# Altium PCB QEV1_Shutdown1_final.PcbDoc
Units mm, origin at the board's own origin, x right, y up, seen from the top; angles counter-clockwise.
Board outline 167.1 x 73.86 mm, 2 copper layers (Top Layer, Bottom Layer), stack 1.591 mm thick; 128 components, 110 nets, 435 pads, 215 vias.
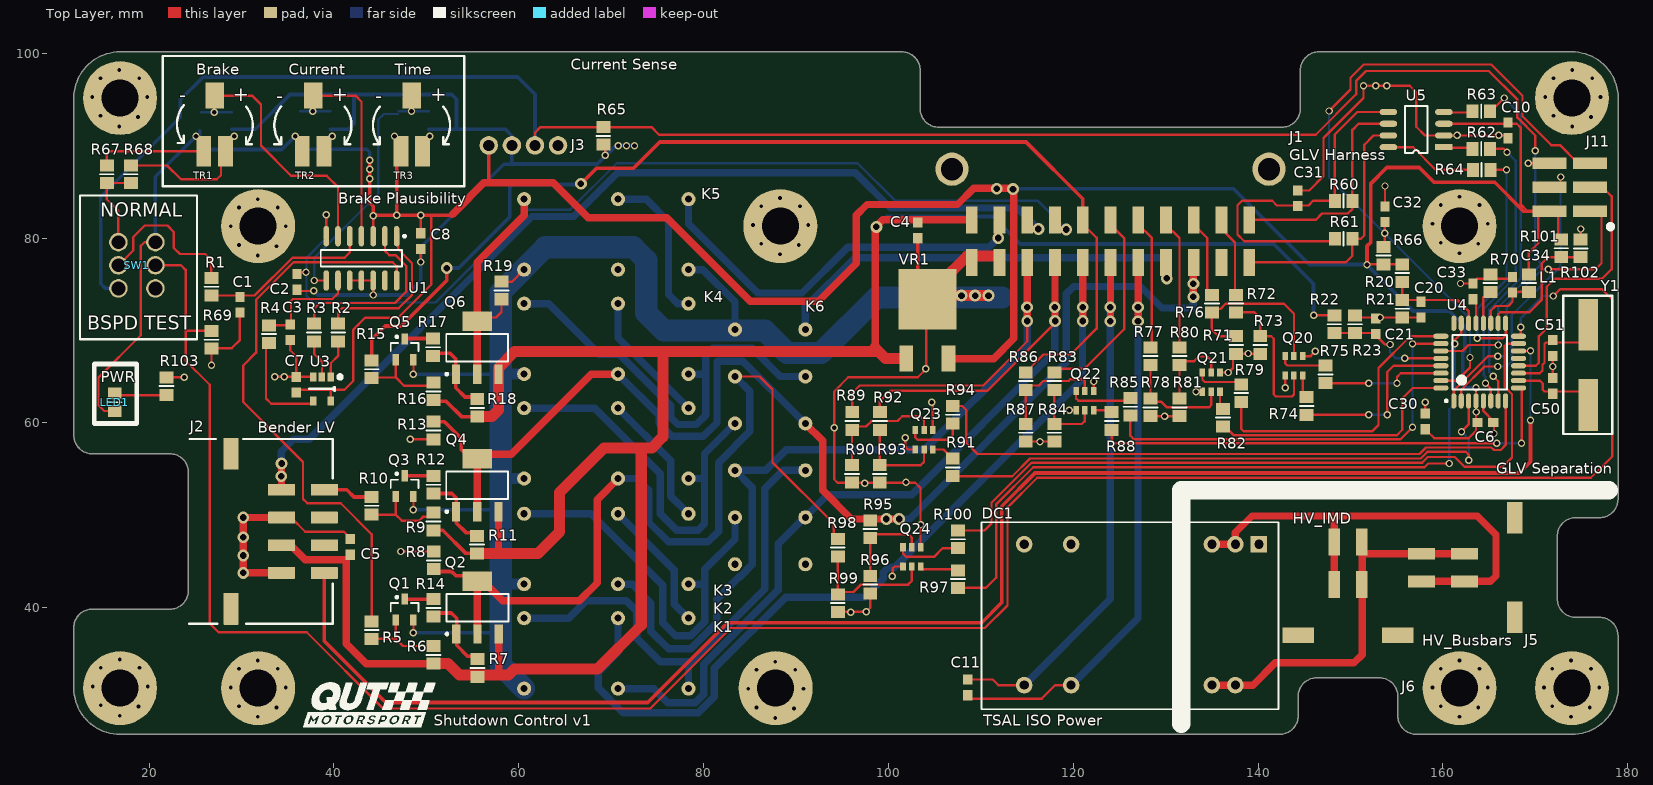
[diagram p0: Top Layer view]
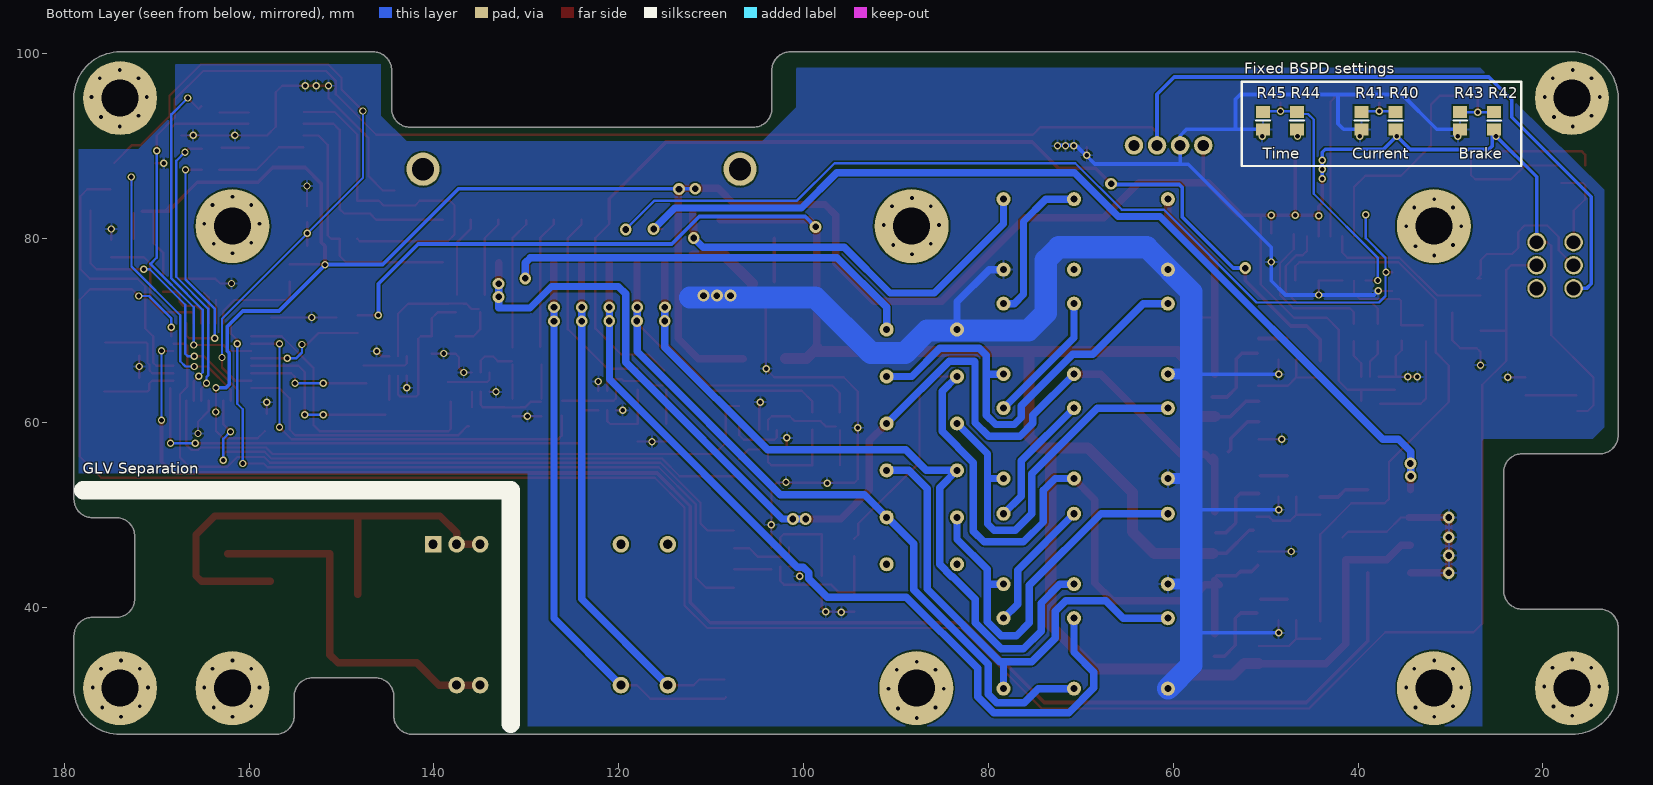
[diagram p1: Bottom Layer view, seen from below]
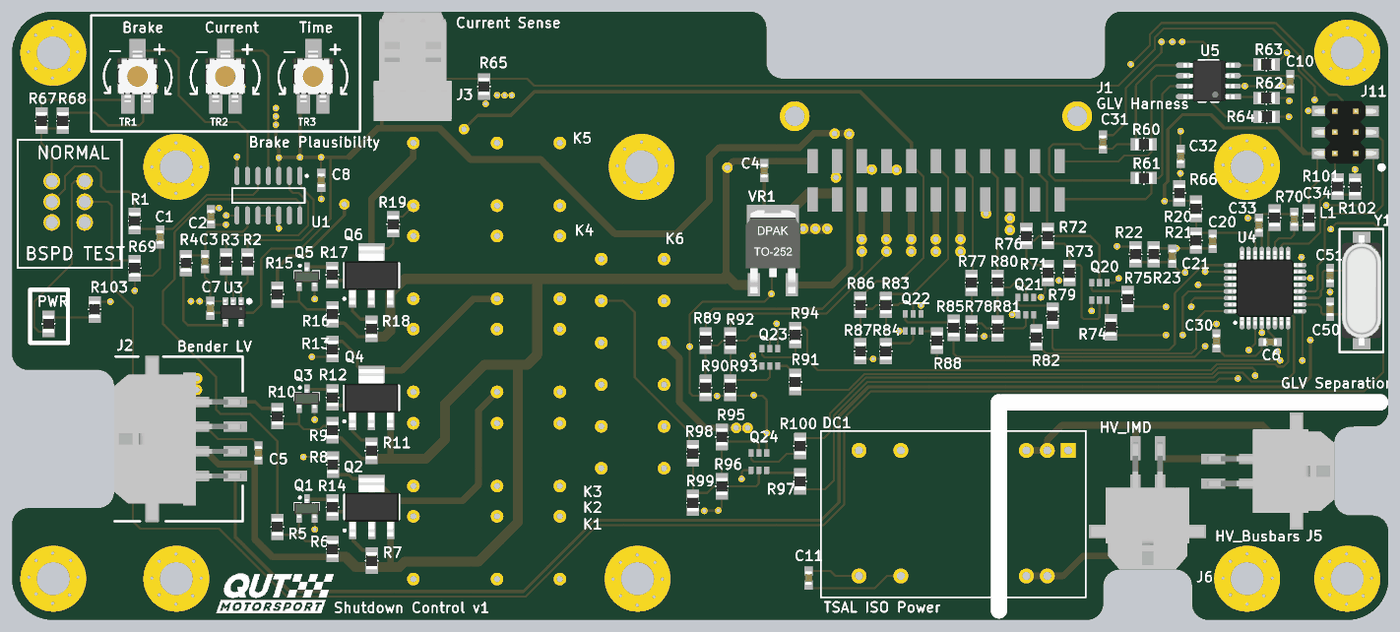
[diagram p2: 3D render of the assembled board from above, using the file's embedded part models]
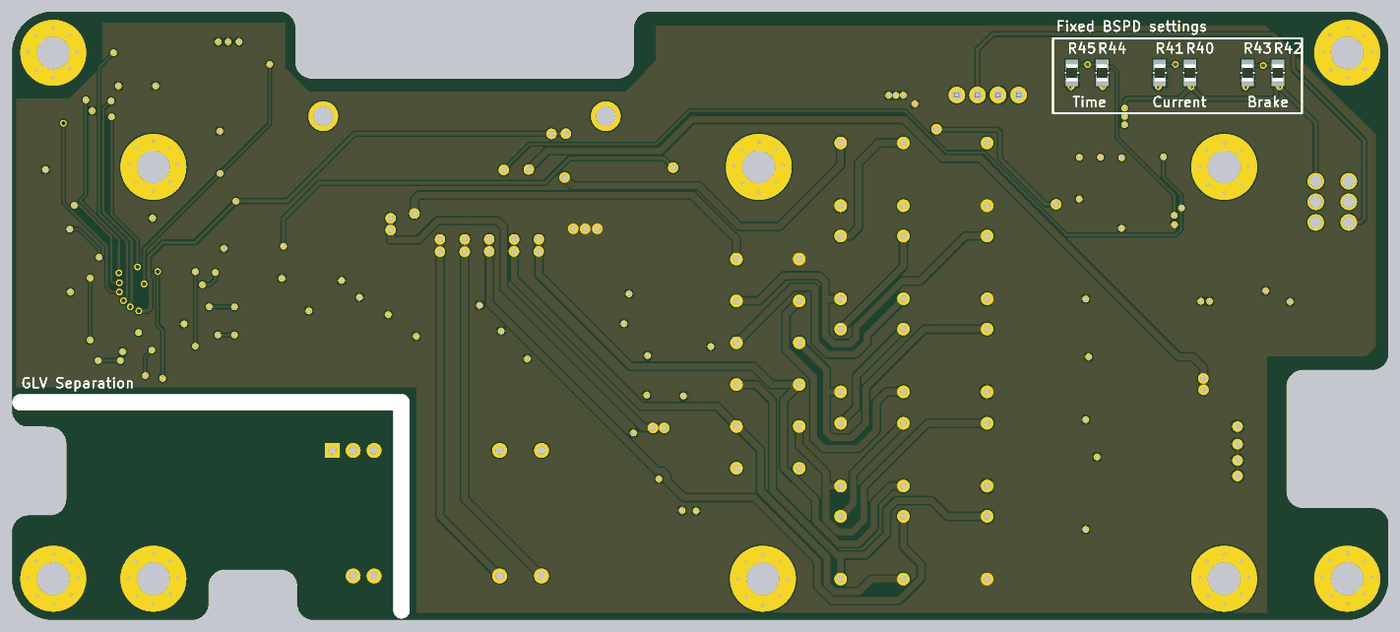
[diagram p3: 3D render of the assembled board from below, using the file's embedded part models]

## Layer stack, top to bottom
Top Solder: solder mask 0.0102, Solder Resist, Dk 3.5
Top Layer: signal copper 0.0356
Dielectric 1: dielectric 1.52, FR-4, Dk 4.8
Bottom Layer: signal copper 0.0356
Bottom Solder: solder mask 0.0102, Solder Resist, Dk 3.5

## Board outline
11.856,31.289 11.856,37.85 cw(c13.856,37.85) 13.856,39.85 22.25,39.85 ccw(c22.25,41.85) 24.25,41.85 24.25,54.65 ccw(c22.25,54.65) 22.25,56.65 13.856,56.65 cw(c13.856,58.65) 11.856,58.65 11.856,95.144 cw(c16.856,95.144) 16.856,100.144 101.425,100.144 cw(c101.425,98.144) 103.425,98.144 103.425,94 ccw(c105.425,94) 105.425,92 142.575,92 ccw(c142.575,94) 144.575,94 144.575,98.144 cw(c146.575,98.144) 146.575,100.144 173.955,100.144 cw(c173.955,95.144) 178.955,95.144 178.955,51.742 178.943,51.742 cw(c176.943,51.742) 176.943,49.742 174.371,49.742 ccw(c174.371,47.742) 172.371,47.742 172.371,40.957 ccw(c174.371,40.957) 174.371,38.957 176.943,38.957 cw(c176.943,36.957) 178.943,36.957 178.955,36.957 178.955,31.289 cw(c173.955,31.289) 173.955,26.289 157.125,26.289 cw(c157.125,28.289) 155.125,28.289 155.125,30.4 ccw(c153.125,30.4) 153.125,32.4 146.325,32.4 ccw(c146.325,30.4) 144.325,30.4 144.325,28.289 cw(c142.325,28.289) 142.325,26.289 16.856,26.289 cw(c16.856,31.289)

## Design rules (kind name [scope] priority, off if disabled: settings)
Clearance [All] p1: gap=0.18
HoleSize [All] p1: absolutevalues=TRUE maxlimit=10 minlimit=0.025 maxpercent=80.000 minpercent=20.000
MinimumSolderMaskSliver [All] p1: minsoldermaskwidth=0.16
PolygonConnect [All] p1: connectstyle=Relief reliefconductorwidth=0.254 reliefentries=4 polygonreliefangle="90 Angle" airgapwidth=0.254
RoutingVias [All] p1: holewidth=0.5 width=0.8 viastyle="Through Hole" minholewidth=0.2 minwidth=0.4 maxholewidth=10 maxwidth=10
SilkToSilkClearance [All] p1: silktosilkclearance=0.16
SilkToSolderMaskClearance [IsPad] p1: minsilkscreentomaskgap=0.16 clearancetoexposedcopper=TRUE
SolderMaskExpansion [IsVia] p1: expansion=-2
Width [All] p1: maxlimit=10 minlimit=0.16 preferedwidth=0.254
26 further rules are at their usual default settings.

## Components (designator, comment, footprint, x,y, rotation, side; value= is the part's Value field where it differs from the comment)
C1 "100nF" 0603 29.825,72.775 r0 top
C2 "10nF" 0603 36,75.25 r0 top
C3 "100nF" 0603 35.275,69.8 r0 top
C4 "100nF" 0603 103.175,80.825 r0 top
C5 "100nF" 0603 41.775,46.575 r180 top
C6 "100nF" 0603 164.6,60.025 r90 top
C7 "100nF" 0603 35.925,64.125 r180 top
C8 "100nF" 0603 49.4,79.675 r0 top
C10 "100nF" 0603 167.025,91.65 r0 top
C11 "0603" 0603 108.575,31.375 r0 top
C20 "0603" 0603 157.625,72.25 r0 top
C21 "0603" 0603 152.725,70.45 r180 top
C30 "0603" 0603 158.075,60.15 r0 top
C31 "0603" 0603 144.275,84.3 r180 top
C32 "0603" 0603 153.725,82.575 r180 top
C33 "0603" 0603 163.25,74.225 r180 top
C34 "0603" 0603 167.525,74.95 r180 top
C50 "0603" 0603 171.875,64 r180 top
C51 "0603" 0603 171.875,68.1 r0 top
DC1 "RDD08110S12" RECOM_DIP24 140.081,46.863 r270 top locked
J1 "0430452207" MICROFIT_22CT_RA_SMD 109.025,81.975 r180 top locked
J2 "43045-0806" MOLEX_8PIN_RA_SMD 33.909,48.26 r90 top locked
J3 "22-05-1042" MOLEX_22-05-1042_RA 64.25,90.025 r270 top
J5 "HV_Busbars" Microfit_4ct_RA_SMD 162.306,45.847 r90 top
J6 "HV_IMD" Microfit_4ct_RA_SMD 151.225,42.5 r0 top
J11 "015910060" ISP_SMD_6PIN 173.725,85.5 r180 top
K1 "G6B-2214P-US DC12" OMRON_G6B_RELAY_6PIN 69.469,35.052 r90 top locked
K2 "G6B-2214P-US DC12" OMRON_G6B_RELAY_6PIN 69.469,46.355 r90 top locked
K3 "G6B-2214P-US DC12" OMRON_G6B_RELAY_6PIN 69.469,57.785 r90 top locked
K4 "G6B-2214P-US DC12" OMRON_G6B_RELAY_6PIN 69.469,69.088 r90 top locked
K5 "G6B-2214P-US DC12" OMRON_G6B_RELAY_6PIN 69.469,80.391 r90 top locked
K6 "S4EB-12V" PANASONIC_SSERIES_4POLE 87.2,57.4 r0 top locked
L1 "10uH" 0805_SAE 169.3,75.125 r180 top
LED1 "RES_0805_SAE" 0805_SAE 16.275,62.225 r0 top
Q1 "2N7002" SOT23_SAE 47.65,39.8 r0 top
Q2 "MOSFET_P_SAE" SOT-223 55.525,40 r0 top
Q3 "2N7002" SOT23_SAE 47.65,53.15 r0 top
Q4 "MOSFET_P_SAE" SOT-223 55.5,53.25 r0 top
Q5 "2N7002" SOT23_SAE 47.65,67.95 r0 top
Q6 "MOSFET_P_SAE" SOT-223 55.5,68.125 r0 top
Q20 "DUAL_NPN" SOT-457 143.875,66.175 r180 top
Q21 "DUAL_NPN" SOT-457 134.925,64.4 r0 top
Q22 "DUAL_NPN" SOT-457 121.25,62.4 r0 top
Q23 "DUAL_NPN" SOT-457 103.85,58.175 r180 top
Q24 "DUAL_NPN" SOT-457 102.525,45.5 r180 top
R1 "RES_0805_SAE" 0805_SAE 26.75,74.725 r180 top
R2 "4K7" 0805_SAE 40.45,69.775 r180 top
R3 "4K7" 0805_SAE 37.85,69.775 r0 top
R4 "1K" 0805_SAE 32.975,69.6 r0 top
R5 "220R" 0805_SAE 44.075,37.575 r180 top
R6 "4K7" 0805_SAE 50.775,34.9 r180 top
R7 "10K" 0805_SAE 55.525,33.475 r180 top
R8 "10K" 0805_SAE 50.8,45.125 r180 top
R9 "4K7" 0805_SAE 50.775,49.325 r180 top
R10 "220R" 0805_SAE 44.075,51.025 r0 top
R11 "10K" 0805_SAE 55.475,46.825 r0 top
R12 "4K7" 0805_SAE 50.775,53.3 r0 top
R13 "10K" 0805_SAE 50.775,59.175 r180 top
R14 "4K7" 0805_SAE 50.775,39.975 r180 top
R15 "220R" 0805_SAE 44.075,65.8 r0 top
R16 "10K" 0805_SAE 50.775,63.4 r180 top
R17 "4K7" 0805_SAE 50.725,68.175 r0 top
R18 "10K" 0805_SAE 55.5,61.625 r0 top
R19 "10K" 0805_SAE 58.125,74.325 r0 top
R20 "RES_0805_SAE" 0805_SAE 155.6,76.2 r0 top
R21 "RES_0805_SAE" 0805_SAE 155.6,72.35 r0 top
R22 "RES_0805_SAE" 0805_SAE 148.25,70.675 r0 top
R23 "RES_0805_SAE" 0805_SAE 150.475,70.675 r180 top
R40 "Not Pop" 0805_SAE 35.941,92.71 r0 bottom
R41 "0805" 0805_SAE 39.624,92.71 r180 bottom
R42 "Not Pop" 0805_SAE 25.273,92.71 r0 bottom
R43 "Not Pop" 0805_SAE 28.956,92.71 r0 bottom
R44 "Not Pop" 0805_SAE 46.609,92.71 r0 bottom
R45 "Not Pop" 0805_SAE 50.292,92.71 r0 bottom
R60 "RES_0805_SAE" 0805_SAE 149.25,84.025 r90 top
R61 "RES_0805_SAE" 0805_SAE 149.25,79.925 r270 top
R62 "RES_0805_SAE" 0805_SAE 164.15,89.65 r90 top
R63 "RES_0805_SAE" 0805_SAE 164.15,93.725 r90 top
R64 "RES_0805_SAE" 0805_SAE 164.175,87.375 r90 top
R65 "RES_0805_SAE" 0805_SAE 69.15,91.05 r0 top
R66 "RES_0805_SAE" 0805_SAE 153.575,78.1 r180 top
R67 "RES_0805_SAE" 0805_SAE 15.425,86.9 r0 top
R68 "RES_0805_SAE" 0805_SAE 18.025,86.9 r180 top
R69 "RES_0805_SAE" 0805_SAE 26.75,69 r0 top
R70 "RES_0805_SAE" 0805_SAE 165.125,75.125 r180 top
R71 "RES_0805_SAE" 0805_SAE 137.625,68.425 r0 top
R72 "RES_0805_SAE" 0805_SAE 137.6,72.9 r180 top
R73 "RES_0805_SAE" 0805_SAE 140.225,68.425 r180 top
R74 "RES_0805_SAE" 0805_SAE 145.25,61.825 r0 top
R75 "RES_0805_SAE" 0805_SAE 147.3,65.25 r0 top
R76 "RES_0805_SAE" 0805_SAE 135,72.9 r0 top
R77 "RES_0805_SAE" 0805_SAE 128.35,67.225 r0 top
R78 "RES_0805_SAE" 0805_SAE 128.35,61.675 r0 top
R79 "RES_0805_SAE" 0805_SAE 138.175,63.225 r0 top
R80 "RES_0805_SAE" 0805_SAE 131.5,67.225 r180 top
R81 "RES_0805_SAE" 0805_SAE 131.5,61.675 r180 top
R82 "RES_0805_SAE" 0805_SAE 136.2,60.575 r0 top
R83 "RES_0805_SAE" 0805_SAE 117.95,64.525 r0 top
R84 "RES_0805_SAE" 0805_SAE 117.95,58.925 r0 top
R85 "RES_0805_SAE" 0805_SAE 126.175,61.75 r0 top
R86 "RES_0805_SAE" 0805_SAE 114.85,64.525 r180 top
R87 "RES_0805_SAE" 0805_SAE 114.85,58.925 r180 top
R88 "RES_0805_SAE" 0805_SAE 124.15,60.2 r0 top
R89 "RES_0805_SAE" 0805_SAE 96.075,60.2 r0 top
R90 "RES_0805_SAE" 0805_SAE 96.05,54.475 r0 top
R91 "RES_0805_SAE" 0805_SAE 106.95,55.175 r0 top
R92 "RES_0805_SAE" 0805_SAE 99.075,60.2 r180 top
R93 "RES_0805_SAE" 0805_SAE 99.05,54.475 r180 top
R94 "RES_0805_SAE" 0805_SAE 106.95,60.875 r180 top
R95 "RES_0805_SAE" 0805_SAE 98.025,48.5 r0 top
R96 "RES_0805_SAE" 0805_SAE 98.025,42.5 r0 top
R97 "RES_0805_SAE" 0805_SAE 107.525,43.1 r0 top
R98 "RES_0805_SAE" 0805_SAE 94.525,46.5 r180 top
R99 "RES_0805_SAE" 0805_SAE 94.525,40.5 r180 top
R100 "RES_0805_SAE" 0805_SAE 107.525,47.4 r180 top
R101 "RES_0805_SAE" 0805_SAE 172.8,78.9 r180 top
R102 "RES_0805_SAE" 0805_SAE 174.9,78.875 r0 top
R103 "RES_0805_SAE" 0805_SAE 21.875,63.975 r0 top
SW1 "Jaycar_DPDT" Jaycar_9mm_switch 18.675,77.05 r180 top
TR1 "10K Copal Trimmer" COPAL_ST4EB_TRIMMER 25.908,89.408 r0 top
TR2 "Current" COPAL_ST4EB_TRIMMER 36.576,89.408 r0 top
TR3 "10K Copal Trimmer" COPAL_ST4EB_TRIMMER 47.244,89.408 r0 top
U1 "LM339MX" M14A_N 42.975,77.8 r270 top
U3 "NC7SZ08" SOT23-5 39.65,64.975 r270 top
U4 "ATmega64M1-16AU" ATMEL_QFP32 163.975,66.575 r180 top locked
U5 "TJA1040" SOP8_TJA1040 160.1,89.825 r180 top
VR1 "MC78M05CDTG" D-PAK 101.925,66.975 r0 top
Y1 "ABLS_XTAL_SAE" ABLS_XTAL_SMD 176.15,66.2 r270 top

## Footprints (in the part's own frame and the unit in brackets; to place one, negate y for a bottom-side part, rotate by r counter-clockwise, add the part's x,y. Pads: shape width x height; smd on the part's side, far side on the other; paste and mask are expansions set on the pad)
0603 [mm]
  rect 1x1.1 smd: 1(0,-0.85) 2(0,0.85)
  body extent -0.45,-0.85 0.45,0.85, height 0.9
0805_SAE [mm]
  rect 1.5x1.3 smd: 1(0,-0.95) 2(0,0.95)
  silkscreen extent -0.75,0 0.75,0, body extent -0.67,-1.05 0.68,1.05, height 0.6
ABLS_XTAL_SMD [mm]
  rect 5.6x2.1 smd: 1(4.275,-0.45) 2(-4.425,-0.45)
  silkscreen extent -7.55,-3.13 7.4,2.17, body extent -6.78,-2.85 6.62,1.95, height 4
ATMEL_QFP32 [mm]
  oval 0.55x1.65 smd: 1(2.8,4.2) 2(2,4.2) 3(1.2,4.2) 4(0.4,4.2) 5(-0.4,4.2) 6(-1.2,4.2) 7(-2,4.2) 8(-2.8,4.2) 17(-2.8,-4.2) 18(-2,-4.2) 19(-1.2,-4.2) 20(-0.4,-4.2) 21(0.4,-4.2) 22(1.2,-4.2) 23(2,-4.2) 24(2.8,-4.2)
  oval 1.65x0.55 smd: 9(-4.2,2.8) 10(-4.2,2) 11(-4.2,1.2) 12(-4.2,0.4) 13(-4.2,-0.4) 14(-4.2,-1.2) 15(-4.2,-2) 16(-4.2,-2.8) 25(4.2,-2.8) 26(4.2,-2) 27(4.2,-1.2) 28(4.2,-0.4) 29(4.2,0.4) 30(4.2,1.2) 31(4.2,2) 32(4.2,2.8)
  silkscreen extent -2.95,-2.95 3.75,4.32, body extent -4.5,-4.5 4.5,4.5, height 1.1
COPAL_ST4EB_TRIMMER [mm]
  rect 1.6x3.3 smd: 1(2.35,0) 3(0,0)
  rect 2x2.8 smd: 2(1.175,6)
  body extent -1.32,-0.22 3.68,5.98, height 2.35
D-PAK [mm]
  rect 1.5x2.8 smd: 1(0,0) 3(4.572,0)
  rect 6.3x6.6 smd: 2(2.286,6.4)
  body extent -1.07,-1.05 5.67,9.05, height 2.37
ISP_SMD_6PIN [mm]
  rect 3.68x1.27 smd: 1(-2.2,2.6) 2(2.2,2.6) 3(-2.2,0) 4(2.2,0) 5(-2.2,-2.6) 6(2.2,-2.6)
  silkscreen extent -4.66,4.02 -4.14,4.53, body extent -3.75,-3.81 3.75,3.81, height 9.7
Jaycar_9mm_switch [mm]
  round 2 hole 1.5: 1(-2,2.5) 2(-2,0) 3(-2,-2.5) 4(2,2.5) 5(2,0) 6(2,-2.5)
  body extent -4.6,-4.6 4.6,4.71, height 24.28
M14A_N [mm] "SOIC, 14-Leads, Body 8.6x3.9mm, Pitch 1.27mm, IPC Medium Density"
  oval 2.2x0.6 smd: 1(-2.4,3.81) 2(-2.4,2.54) 3(-2.4,1.27) 4(-2.4,0) 5(-2.4,-1.27) 6(-2.4,-2.54) 7(-2.4,-3.81) 8(2.4,-3.81) 9(2.4,-2.54) 10(2.4,-1.27) 11(2.4,0) 12(2.4,1.27) 13(2.4,2.54) 14(2.4,3.81)
  silkscreen extent -2.52,-4.4 0.9,4.79, body extent -2,-4.38 2,4.38, height 1.75
Microfit_4ct_RA_SMD [mm]
  rect 1.27x2.92 smd: 1(0,0) 2(-3,0) 3(0,4.63) 4(-3,4.63)
  rect 3.43x1.65 smd: ""(-6.895,-5.47) ""(3.895,-5.47)
  body extent -8.32,-10.08 5.33,5.32, height 8.75
MICROFIT_22CT_RA_SMD [mm]
  rect 1.27x2.92 smd: 1(0,0) 2(-3,0) 3(-6,0) 4(-9,0) 5(-12,0) 6(-15,0) 7(-18,0) 8(-21,0) 9(-24,0) 10(-27,0) 11(-30,0) 12(0,4.63) 13(-3,4.63) 14(-6,4.63) 15(-9,4.63) 16(-12,4.63) 17(-15,4.63) 18(-18,4.63) 19(-21,4.63) 20(-24,4.63) 21(-27,4.63) 22(-30,4.63)
  round 3.6 hole 2.4: ""(-32.15,-5.47) ""(2.15,-5.47)
  body extent -33.55,-10.08 3.6,5.32, height 8.76
MOLEX_8PIN_RA_SMD [mm]
  rrect10% 1.27x2.92 smd: 1(-4.5,-0.42) 2(-1.5,-0.42) 3(1.5,-0.42) 4(4.5,-0.42) 5(-4.5,-5.05) 6(-1.5,-5.05) 7(1.5,-5.05) 8(4.5,-5.05)
  rrect10% 3.43x1.65 smd: ""(-8.395,5.05) ""(8.395,5.05)
  silkscreen extent -10,-5.95 10,9.6, body extent -9.82,-5.77 9.82,9.62, height 8.78
MOLEX_22-05-1042_RA [mm] "Molex 2.5mm 4pin RA (LEM)"
  round 2 hole 1.2: 1(0,0) 2(0,-2.5) 3(0,-5) 4(0,-7.5)
  body extent -10.1,-8.5 3.2,1, height 6.32
OMRON_G6B_RELAY_6PIN [mil]
  round 60 hole 30: 1(-150,350) 3(-150,-50) 4(-150,-350) 5(150,-350) 6(150,-50) 8(150,350)
  body extent -217,-394 217,394, height 433
PANASONIC_SSERIES_4POLE [mil]
  round 60 hole 30: 1(-150,500) 2(-150,300) 3(-150,100) 4(-150,-100) 5(-150,-300) 6(-150,-500) 7(150,-500) 8(150,-300) 9(150,-100) 10(150,100) 11(150,300) 12(150,500)
  body extent -236,-551 236,551, height 433
RECOM_DIP24 [mm]
  rect 1.8x1.8 hole 1: 1(0,0)
  round 1.8 hole 1: 2(0,-2.54) 3(0,-5.08) 9(0,-20.32) 11(0,-25.4) 14(15.24,-25.4) 16(15.24,-20.32) 22(15.24,-5.08) 23(15.24,-2.54)
  silkscreen extent -2.37,-30.02 17.85,2.12, body extent -2.27,-29.92 17.75,2.02, height 10.2
SOP8_TJA1040 [mm]
  rect 1.9x0.65 smd: 1(0,0)
  oval 1.9x0.65 smd: 2(0,-1.27) 3(0,-2.54) 4(0,-3.81) 5(6,-3.81) 6(6,-2.54) 7(6,-1.27) 8(6,0)
  silkscreen extent 1.78,-4.44 4.22,0.64, body extent -0.17,-4.4 6.03,0.6, height 1.75
SOT23-5 [mm]
  rect 1x0.7 smd: 1(0,0)
  rrect10% 1x0.7 smd: 2(0,-0.95) 3(0,-1.9) 4(2.6,-1.9) 5(2.6,0)
  silkscreen extent -0.2,-2.38 1.54,1.2, body extent -0.2,-2.47 2.8,0.58, height 1.45
SOT23_SAE [mm]
  rect 0.7x1.2 smd: 1(-0.95,-1.125) 2(0.95,-1.125) 3(0,1.125)
  silkscreen extent -1.5,-0.2 1.5,1.47, body extent -1.5,-1.13 1.5,1.13, height 1.21
SOT-223 [mm]
  rect 0.9x2.1 smd: 1(-2.3,-2.85) 2(0,-2.85) 3(2.3,-2.85)
  rect 3.2x2.1 smd: 2(0,2.85)
  silkscreen extent -3.42,-2.97 3.35,1.5, body extent -3.25,-3.56 3.25,3.51, height 1.6
SOT-457 [mm]
  rect 0.6x0.9 smd: 1(0.95,-1.05) 2(0,-1.05) 3(-0.95,-1.05) 4(-0.95,1.05) 5(0,1.05) 6(0.95,1.05)
  body extent -1.5,-1.37 1.5,1.43, height 0.98

## Part data
C1 C2 C11 C20 C21 C30 C31 C32 C33 C34 C50 C51: library part CAP_0603_SAE
C3 C4 C5 C6 C7 C8 C10: library part CAP_0603_SAE, "0603"
DC1: library part XP_POWER_DCDC_RDDser
J1: library part Microfit_HDR_SMD_RA_22ct
J2: library part 8_pin_header
J3: library part Molex_22-04-1041_4pin_RA_LEM
J5 J6: library part Microfit_HDR_4ct
J11: library part ISP_SMD
K1 K2 K3 K4 K5: library part SAE_Relay_DPST
K6: library part SAE_Relay_4PST
L1: library part 0805_Inductor
LED1 R1 R20 R21 R22 R23 R60 R61 R62 R63 R64 R65 R66 R67 R68 R69 R70 R71 R72 R73 R74 R75 R76 R77 R78 R79 R80 R81 R82 R83 R84 R85 R86 R87 R88 R89 R90 R91 R92 R93 R94 R95 R96 R97 R98 R99 R100 R101 R102 R103: "0805"
Q1 Q3 Q5: library part 2N7002_SAE
R2 R3 R4: library part RES_0805_SAE, "10K"
R5 R6 R7 R8 R9 R10 R11 R12 R13 R14 R15 R16 R17 R18 R19 R44 R45: library part RES_0805_SAE, "0805"
R40: library part RES_0805_SAE, "Not Pop."
R41: library part RES_0805_SAE, "Not Pop"
R42 R43: library part RES_0805_SAE
TR1 TR2: library part Copal_Trimmer, "Copal Trimmer 10K"
TR3: library part Copal_Trimmer
U1: "Low Power Low Offset Voltage Quad Comparator, 14-pin Narrow SOIC"
U4: "8-Bit AVR Microcontroller with 8K Bytes of In-System Programmable Flash Memory"
VR1: library part 78M05_Dpak

## Free pads (board coordinates)
  round 8 hole 4: ""(16.856,95.144) ""(16.856,31.289) ""(31.797,31.289) ""(31.797,81.289) ""(87.797,31.289) ""(88.297,81.289) ""(161.797,31.289) ""(161.797,81.289) ""(173.955,31.289) ""(173.955,95.144)

## Via types
v1: diameter 0.8, hole 0.5, Top Layer to Bottom Layer, 103 vias
v2: diameter 0.75, hole 0.4, Top Layer to Bottom Layer, 80 vias
v3: diameter 1.27, hole 0.711, Top Layer to Bottom Layer, 32 vias

## Nets (pads, with @x,y where several pads share a name; then routed paths per layer and width w, separated by ;. In a path a pad name is that pad's centre, name@x,y a point inside that pad or via, vN(x,y) a via of type N, cw(c..) or ccw(c..) an arc to the next point about the centre after c; other vN are vias at no path point)
5V: C6.2 C7.2 C8.2 C10.2 C30.1 J3.4 J11.2 L1.1 LED1.1 R20.2 R40.2 R42.2 R44.2 R66.2 R67.2 R101.1 SW1.3 TR1.3 TR2.3 TR3.3 U1.3 U3.5 U4.4 U5.3 VR1.3 | length 378.1
  Top Layer w0.254: R67.2 15.425,89 15.833,89.408 TR1.3 ; LED1.1 15.15,61.275 14.525,61.9 14.525,64.9 19.1,69.475 19.1,79.15 19.5,79.55 SW1.3 ; C7.2@36.025,63.575 39.65,63.575 ; U3.5 39.65,63.575 ; U1.3 v1@44.245,82.45 ; C8.2@49.375,80.525 v1(49.375,82.45) ; 50.525,82.475 50.525,74.975 46.925,71.375 43.375,71.375 42.1,70.1 42.1,64.55 41.125,63.575 39.65,63.575 ; v1@151.575,77.15 R20.2 ; C30.1@158.3,59.1 159.075,58.325 162.775,58.325 163.575,59.125 v1@163.575,63.775 ; U5.3 167.985,92.365 168.4,91.95 168.4,83.675 169.175,82.9 J11.2 ; L1.1 169.3,78.425 170.3,79.425 J11.2@170.3,82.85 ; R101.1@172.475,79.925 J11.2@172.475,82.7
  Top Layer w0.4: v1(43.875,88.425) 43.875,83.8 44.245,83.43 v1(44.245,82.4) ; v1@44.245,82.45 v1(49.375,82.45) 53,82.45 56.75,86.2 J3.4 ; v1(46.81,82.45) TR3.3@46.81,88.585 ; v1(151.775,77.125) 151.775,79.125 152.2,79.55 152.2,85.9 153.925,87.625 157.425,87.625 159.025,86.025 165.6,86.025 168.725,82.9 J11.2
  Top Layer w0.8: 52.8,82.55 56.225,85.975 63.725,85.975 67.5,82.2 76.025,82.2 85.05,73.175 92.425,73.175 96.5,77.25 96.5,82.45 97.675,83.625 107.475,83.625 109.225,85.375 113.55,85.375 113.55,69.125 111.375,66.95 VR1.3@106.519,66.95
  Bottom Layer w0.4: SW1.3 20.675,86.623 v1(25.076,91.024) ; R42.2@25.475,91.6 25.475,89.95 25.85,89.575 34.352,89.575 35.777,91 35.85,91 37.25,89.6 43.55,89.6 43.875,89.275 v1(43.875,86.4) ; v3(111.725,85.325) 137.325,85.325 145.525,77.125 151.725,77.125 156.75,72.1 160.675,72.1 162.35,70.425 162.35,67.75 162.145,67.545 162.145,64.155 162.5,63.8 v1(163.575,63.8)
  other v1: 163.6,61.175 43.875,87.425 35.801,91.024 46.551,91.024
  other v3: 113.475,85.3
5V_DIV: C20.2 R20.1 R21.2 U4.22 | length 10.7
  Top Layer w0.254: R20.1 155.6,73.675 155.975,73.3 161.575,73.3 162.775,72.1 U4.22
12V: C4.2 C5.2 J1.1 J2.2 Q2.3 Q4.3 Q6.3 R6.2 R7.2 R9.2 R11.1 R16.2 R18.1 R22.2 VR1.1 | length 262.7
  Top Layer w0.254: v1@145.95,71.625 R22.2
  Top Layer w0.4: R16.2@50.775,62.325 52.15,62.325 53.8,60.675 R18.1 ; R9.2@51.35,48.375 51.775,48.375 54.275,45.875 R11.1@55.525,45.875
  Top Layer w0.8: J2.2 35.34,46.76 36.9,45.2 41.325,45.2 41.325,36.1 43.475,33.95 52.425,33.95 ; 57.8,45.9 Q4.3 ; 57.825,32.575 Q2.3 ; 98.55,67.7 98.55,81.125 99.4,81.975 J1.1
  Top Layer w1.2: R6.2 52.35,33.95 53.6,32.7 58.875,32.7 59.55,33.375 68.525,33.375 73.25,38.1 73.25,57.225 ; R18.1 57.075,60.675 57.8,61.4 57.8,65.95 59.55,67.7 98.55,67.7 ; R11.1@55.7,45.875 62.075,45.875 64.4,48.2 64.4,52.475 69.2,57.275 74.4,57.275 75.625,58.5 75.625,67.525 ; 98.55,68.125 99.7,66.975 VR1.1
  Bottom Layer w0.4: v3(98.7,81.2) 99.825,82.325 111.275,82.325 114.25,79.35 141.7,79.35 146,75.05 v1(146,71.65)
12V_DIV: C21.2 R22.1 R23.2 U4.28 | length 13.2
  Top Layer w0.254: R22.1 152.475,69.725 153.725,68.475 v1(154.275,68.475) ; v1(155.85,66.975) U4.28
  Bottom Layer w0.254: v1(154.275,68.475) 154.275,67.625 154.925,66.975 v1(155.85,66.975)
AGND: R70.2 U4.20 | length 3.5
  Top Layer w0.254: U4.20 164.375,73.575 R70.2@164.875,74.075
AREF: C33.2 U4.21 | length 2.5
  Top Layer w0.254: U4.21 C33.2@163.575,73.325
AVCC: C34.2 L1.2 U4.19 | length 6.8
  Top Layer w0.254: U4.19 165.175,72.125 165.7,72.65 167.075,72.65 167.525,73.1 167.525,73.85 167.85,74.175 L1.2
BENDER_PWM: J2.5 U4.14 | length 170.8
  Top Layer w0.254: U4.14 v1@169.45,67.775
  Top Layer w0.4: J2.5 38.959,36.391 45.6,29.75 73.95,29.75 82.582,38.382 110.082,38.382 112.25,40.55 112.25,50.975 115.85,54.575 168.25,54.575 169.475,55.8 v1(169.475,60.275)
  Bottom Layer w0.254: v1(169.475,60.275) v1(169.475,67.8)
BMS1_RESET: K2.4 K2.8 K6.5 | length 42.5
  Bottom Layer w0.8: K2.8 67.818,50.165 75.565,42.418 75.565,38.354 76.962,36.957 78.624,36.957 80.137,38.47 80.137,44.162 83.39,47.415 K6.5 ; K2.4 80.137,42.545
BMS2_RESET: K1.4 K1.8 K6.9 | length 53.5
  Bottom Layer w0.8: K1.8 65.405,38.862 67.31,40.767 71.628,40.767 72.771,39.624 72.771,36.703 75.311,34.163 78.763,34.163 86.625,42.025 86.625,52.875 88.614,54.864 K6.9@91.01,54.864 ; K1.4 78.359,34.163
BMS_ALARM1: J1.14 K2.3 K6.4 R89.2 | length 108.7
  Top Layer w0.254: R89.2 96.075,63.225 96.9,64.05 110.25,64.05 115.025,68.825 v3(115.025,71.025)
  Top Layer w0.8: v3(115.025,71.025) J1.14
  Bottom Layer w0.8: K2.3 72.263,42.545 74.295,40.513 74.295,37.465 76.2,35.56 78.613,35.56 81.407,38.354 81.407,40.894 83.871,43.358 83.946,43.358 85.275,44.687 85.275,52.975 K6.4 86.735,54.86 88.95,57.075 103.875,57.075 115,68.2 v3(115,72.5)
BMS_ALARM2: J1.15 K1.3 K6.8 R92.1 | length 103.4
  Top Layer w0.254: R92.1 99.075,62.35 100.2,63.475 110.7,63.475 118.025,70.8 v3(118.025,71.025)
  Top Layer w0.8: v3(118.025,71.025) J1.15
  Bottom Layer w0.8: K1.3 74.583,31.242 76.1,29.725 79.1,29.725 80.01,30.635 80.01,33.885 88.075,41.95 88.075,46.9 93.4,52.225 102.5,52.225 118,67.725 v3(118,72.5)
BMS_WARN1: R91.1 U4.3 | length 65
  Top Layer w0.254: R91.1 113.4,54.225 115.325,56.15 157.586,56.15 158.311,56.875 162.475,56.875 162.775,56.575 v1(162.775,55.95) ; v1(162,59.05) 162.775,59.825 U4.3
  Bottom Layer w0.254: v1(162,59.05) 162.775,58.275 v1@162.775,55.675
BMS_WARN2: R94.1 U4.8 | length 69.4
  Top Layer w0.254: R94.1 107.975,61.825 108.425,61.375 108.425,57.85 109.65,56.625 157.447,56.625 158.163,57.341 165.234,57.341 165.507,57.068 166.243,57.068 166.775,57.6 U4.8
BRK_PRS_BUF: C2.2 J1.4 U1.7 | length 104.4
  Top Layer w0.254: C2.2@36.3,76.3 v1(36.975,76.3) ; U1.7 v1(39.165,82.515)
  Bottom Layer w0.254: v1(39.165,82.515) 39.165,79.99 37.025,77.85 37.025,73.725 37.725,73.025 50.975,73.025 61,83.05 65.55,83.05 70.6,88.1 96.65,88.1 100.7,84.05 116.125,84.05 v3(119.25,80.925)
BSPD_ALARM: K3.3 K6.2 Q2.2 R8.2 R98.1 | length 97.5
  Top Layer w0.254: K6.2 86.055,65.02 87.45,63.625 87.45,55.725 94.075,49.1 94.075,47.9 R98.1
  Top Layer w0.4: R8.2@50.85,44.575 51.5,43.925 52.725,43.925 53.2,43.45 Q2.2@55.3,43.45
  Top Layer w0.8: Q2.2@55.525,37.15 55.525,43 55,42.475 56.55,42.475 58.275,40.75 66.55,40.75 68.475,42.675 68.475,51.7 K3.3@70.75,53.975 ; K3.3@70.739,53.964 K3.3
  Bottom Layer w0.8: K3.3 72.771,53.975 74.041,52.705 74.041,49.276 76.2,47.117 80.467,47.117 81.625,48.275 81.625,55.7 85,59.075 85,63.41 K6.2
BSPD_RESET: K3.4 K3.8 K6.3 | length 41.6
  Bottom Layer w0.8: K3.8 68.199,61.595 75.311,54.483 75.311,50.165 77.089,48.387 79.387,48.387 80.1,49.1 80.1,56.65 K6.3 ; K3.4 79.925,53.975
BSPD_WARN: R100.1 U4.15 | length 79.4
  Top Layer w0.254: R100.1 110.4,48.35 111.15,49.1 111.15,51.35 115.5,55.7 157.75,55.7 158.357,56.307 161.268,56.307 162.332,55.243 166.468,55.243 167.475,56.25 167.475,63.1 166.7,63.875 166.7,68.35 166.925,68.575 U4.15
CAN_HI: J1.22 R61.2 U5.7 | length 27.6
  Top Layer w0.254: J1.22@139.03,77.375 149.5,77.375 150.2,78.075 R61.2 151.125,79.925 151.5,80.3 151.5,90.1 152.495,91.095 U5.7
CAN_LO: J1.11 R60.1 U5.6 | length 24.4
  Top Layer w0.254: J1.11 146.25,81.975 146.925,82.65 149.7,82.65 150.2,83.15 R60.1 150.2,91.7 150.865,92.365 U5.6
CAN_RX: R63.2 U5.4 | length 3.2
  Top Layer w0.254: U5.4@160,93.585 R63.2@163.19,93.585
CAN_RX_LINK: R63.1 U4.7 | length 37.4
  Top Layer w0.254: R63.1@165.15,94.275 165.45,93.975 v1(166.625,95.15) ; v1(165.425,65.05) 165.975,64.5 U4.7
  Bottom Layer w0.254: v1(165.425,65.05) 165,65.475 165,72.225 168.4,75.625 168.4,93.375 v1(166.625,95.15)
CAN_SPLIT: C31.2 R60.2 R61.1 U5.5 | length 39.2
  Top Layer w0.254: R61.1 148.025,79.65 138.5,79.65 137.775,80.375 137.775,83.55 138.25,84.025 141.525,84.025 142.025,83.525 145.45,83.525 145.95,84.025 R60.2 148.3,91.2 150.735,93.635 U5.5
CAN_STB: R64.2 U5.8 | length 10.1
  Top Layer w0.254: U5.8 156.775,89.825 159.225,87.375 R64.2
CAN_STB_LINK: R64.1 U4.17 | length 25.8
  Top Layer w0.254: v1(163.725,69.15) 166.5,69.15 166.775,69.425 U4.17 ; R64.1 v1(166.875,87.375)
  Bottom Layer w0.254: v1@163.725,69.125 163.725,72.375 166.875,75.525 v1(166.875,87.375)
CAN_TX: R62.2 U5.1 | length 2.9
  Top Layer w0.254: U5.1@160,89.775 R62.2@162.95,89.775
CAN_TX_LINK: R62.1 U4.6 | length 31
  Top Layer w0.254: v1(164.6,64.3) 165.175,63.725 U4.6 ; R62.1 166.575,89.65 v1(166.925,89.3)
  Bottom Layer w0.254: v1(164.6,64.3) 164.6,64.95 164.432,65.118 164.432,72.357 167.875,75.8 167.875,88.35 v1(166.925,89.3)
GND: C1.1 C2.1 C3.1 C4.1 C5.1 C6.1 C7.1 C8.1 C10.1 C20.1 C21.1 C30.2 C31.1 C32.1 C33.1 C34.1 C50.1 C51.1 J1.12 J1.13 J2.1 J2.3 J3.3 J11.6 K1.1 K2.1 K3.1 K4.1 K5.1 K5.4 K6.1 Q1.2 Q3.2 Q5.2 Q20.3 Q20.6 Q21.3 Q21.6 Q22.3 Q22.6 Q23.3 Q23.6 Q24.3 Q24.6 R8.1 R13.2 R19.2 R21.1 R23.1 R41.1 R43.2 R45.2 R65.1 R68.1 R69.1 R70.1 R71.1 R73.2 R78.1 R81.2 R84.1 R87.2 R90.1 R93.2 R96.1 R99.2 R102.2 R103.2 TR1.1 TR2.1 TR3.1 U1.10 U1.11 U1.12 U3.3 U4.5 U5.2 VR1.2 | length 479.3
  Top Layer w0.254: R68.1@18.15,87.85 21.95,87.85 23.45,86.35 27.325,86.35 27.775,86.8 TR1.1@27.775,89.425 ; R103.2 v1(23.8,64.925) ; v1(26.75,66.25) 26.75,67.675 27.15,68.075 28.925,68.075 29.825,68.975 C1.1 ; v1(33.575,64.975) U3.3 ; J2.3 35.365,49.76 36.9,48.225 41.075,48.225 C5.1@41.675,47.625 ; C3.1@35.275,68.9 35.275,67.85 35.925,67.2 C7.1 ; C2.1@36.275,74.275 v1(37.825,74.275) ; U1.10 U1.12 v1(44.245,73.83) ; v1@47.175,46.075 R8.1 ; v1(48.25,58.225) R13.2 ; v1(48.6,37.275) Q1.2 ; v1(48.6,50.6) Q3.2 ; v1(48.6,65.25) Q5.2 ; v1(49.4,77.4) C8.1 ; R19.2 59.273,75.275 K5.1 ; v1(69.35,88.95) R65.1@69.35,89.85 ; R99.2 97.575,39.55 98.025,40 R96.1 ; v1@100.45,43.4 100.45,44.225 100.675,44.45 Q24.6 ; v1(101.8,58.375) 101.8,57.45 102.125,57.125 Q23.6 ; Q24.3 103.475,52.95 102.9,53.525 R93.2 94.5,53.525 94.125,53.9 94.125,63.4 95.65,64.925 103.175,64.925 104.1,65.85 VR1.2@104.1,72.4 ; Q23.3 v1@104.8,62.3 ; R87.2 R84.1 ; v1(119.575,61.35) Q22.3 ; Q22.6 v1(122.2,64.475) ; R78.1 R81.2 ; v1(133.275,63.35) Q21.3 ; Q21.6 v1(136.775,65.45) 137.275,65.95 137.275,67.1 137.65,67.475 R73.2 ; v1(142.925,63.8) Q20.6 ; C31.1 145.525,85.15 147.075,86.7 147.075,90.825 151.4,95.15 v1(151.4,96.475) 156.4,96.475 157.1,95.775 157.1,92.05 158.055,91.095 U5.2 C10.1@167.37,91.095 ; Q20.3 145.675,67.225 v1(146.2,67.75) ; R23.1@150.575,71.4 C20.1 ; C32.1 v1(153.725,85.625) ; C30.2 v1(158.075,62.225) ; v1(161.9,75.075) 163.125,75.075 163.625,75.575 C34.1@167.6,75.575 ; U4.5 164.375,61.275 165.525,60.125 v1(165.525,58.85) ; v1(169.225,88.1) J11.6@170.125,88.1 ; C50.1 C51.1 ; R102.2 v1(174.9,80.975)
  Top Layer w0.4: VR1.2@103.175,75.275 C4.1
  Top Layer w0.8: J2.1 v3(30.175,43.76) v3(30.175,49.76) J2.3@34.5,49.76
  Top Layer w1.2: VR1.2@105.325,73.775 v3(110.825,73.775) ; VR1.2@105.525,75.075 108.525,78.075 J1.13@111.9,78.075
  Bottom Layer w0.4: R43.2 31.485,91.76 35.25,95.525 52.75,95.525 53.25,95.025 53.25,91.76 ; v1(37.825,74.275) 38.27,73.83 47.855,73.83 49.4,75.375 49.4,79 58.375,87.975 63.975,87.975 ; R41.1 41.56,91.76 42.175,92.375 42.175,95.475 ; v1(48.6,37.275) 57.6,37.275 ; v1(48.6,50.6) 57.75,50.6 ; v1(48.6,65.25) 57.757,65.25 ; R45.2 53.25,91.76 ; v1@72.525,90.025 70.525,90.025 68.5,88 59.25,88 59.25,91.075 58.565,91.76 53.25,91.76
  Bottom Layer w0.8: K5.4 79.919,76.581 83.39,73.11 K6.1
  Bottom Layer w1.2: 57.785,42.545 K2.1 ; 57.785,53.975 K3.1 ; 57.785,65.278 K4.1
  Bottom Layer w2.4: K1.1 58.039,33.782 58.039,74.168 62.865,78.994 72.39,78.994 73.787,77.597 73.787,71.882 75.692,69.977 86.614,69.977 89.027,67.564 92.714,67.564 98.725,73.575 103.725,73.575 ; 103.195,73.57 112.275,73.57
  other v1: 95.9,39.525 97.6,39.575 100.425,43.4 47.225,46.075 103.5,48.975 97.45,53.475 101.9,53.575 116.4,57.975 94.125,59.475 129.875,60.725 104.675,62.25 34.625,64.975 104.05,65.875 171.875,66.1 138.95,67.5 153.225,71.4 71.65,89.975 72.525,89.975 70.75,90 29.201,91.024 39.801,91.024 50.376,91.024 161.525,91.125 166.05,91.125 152.725,96.475 153.925,96.475
  other v3: 30.175,45.65 30.175,47.625 107.9,73.775 109.375,73.775
GND_ALT: J1.3 J2.4 | length 103.4
  Top Layer w0.254: J1.3@115.25,80.975 v3(116.225,80.975)
  Top Layer w0.8: J2.4 v3(34.329,55.604)
  Bottom Layer w0.8: v3(34.3,54.225) 34.3,56.9 35.625,58.225 37.325,58.225 61.425,82.325 65.95,82.325 70.675,87.05 96.425,87.05 100.225,83.25 113.95,83.25 v3(116.225,80.975)
HV_NEG: DC1.2 DC1.3 J5.2 J5.4 J6.2 J6.4 | length 54.8
  Top Layer w0.8: DC1.3 DC1.2 137.541,48.133 139.333,49.925 163.7,49.925 165.735,47.89 165.735,43.434 165.148,42.847 J5.4 ; J6.2@148.257,41.425 148.257,49.85
HV_POS: DC1.22 DC1.23 J5.1 J5.3 J6.1 J6.3 | length 39.6
  Top Layer w0.8: DC1.22 139.446,31.623 141.859,34.036 150.368,34.036 151.257,34.925 151.257,45.847 J5.1
HVD_DETECT: K5.3
HVD_IN: J1.5 R15.2 R86.1 | length 117.2
  Top Layer w0.254: R86.1@115.075,65.7 116.775,67.4 119.725,67.4 122.525,70.2 122.525,80.025 121.025,81.525 J1.5
  Top Layer w0.4: R15.2 44.075,69 45.55,70.475 47.275,70.475 52.2,75.4 v3(52.2,76.75) ; v3(66.725,85.875) 68.4,87.55 72.4,87.55 75.25,90.4 114.875,90.4 121.025,84.25 J1.5
  Bottom Layer w0.4: v3(52.2,76.75) 53.5,76.75 59.025,82.275 59.025,85.475 59.35,85.8 v3@66.65,85.8
HVD_LOCK: K5.8 Q6.2 R19.1 | length 25.2
  Top Layer w0.254: Q6.2@55.6,71.4 57.525,71.4 58.125,72 R19.1
  Top Layer w0.8: Q6.2@55.5,65.275 55.5,70.975 55.5,77.375 60.579,82.454 K5.8
HVD_WARN: R88.1 U4.9 | length 51.7
  Top Layer w0.254: R88.1 124.15,58.025 124.4,57.775 v1(165.8,57.775) ; v1@168.525,57.8 U4.9@168.525,63.75
  Bottom Layer w0.254: v1(165.8,57.775) v1@168.525,57.775
  other v1: 168.5,57.775
IMD_ALARM: J1.20 K4.3 K6.10 Q4.2 R13.1 R95.2 | length 136.3
  Top Layer w0.4: R13.1 51.95,60.125 53.775,58.3 53.775,57.125 Q4.2@54.025,56.875
  Top Layer w0.8: Q4.2@55.5,50.4 Q4.2@55.5,56.1 ; Q4.2@55.65,56.275 55.65,55.7 56.55,56.6 59.2,56.6 67.85,65.25 70.75,65.25 70.739,65.239 K4.3 ; K6.10 91.01,59.915 92.875,58.05 92.875,52.7 95.975,49.6 v3(101.15,49.6) ; v3(133,73.625) J1.20@133,77.32
  Bottom Layer w0.8: K4.3 75.184,60.833 75.184,59.944 76.581,58.547 79.972,58.547 81.45,60.025 81.45,66.591 81.534,66.675 84.25,66.675 90.449,60.477 ; v3(99.775,49.6) 102.3,49.6 119.25,66.55 119.25,73.95 120.05,74.75 127.275,74.75 129.6,72.425 133,72.425 v3(133,75.05)
IMD_RESET: K4.4 K4.8 K6.11 | length 46.9
  Bottom Layer w0.8: K4.8 63.246,72.898 68.707,67.437 70.866,67.437 76.454,61.849 76.454,60.579 77.216,59.817 79.217,59.817 80.225,60.825 80.225,67.325 80.972,68.072 85.253,68.072 88.305,65.02 K6.11 ; K4.4 80.175,65.278
IMD_STATUS: J2.8 R10.2 | length 5.4
  Top Layer w0.4: J2.8 41.39,52.76 42.175,51.975 R10.2
IMD_WARN: R97.1 U4.23 | length 79.1
  Top Layer w0.254: R97.1 110.55,42.15 111.65,43.25 111.65,51.175 115.675,55.2 158,55.2 158.4,55.6 v1(160.675,55.6) ; v1(161.275,68.575) 161.275,68.975 161.975,69.675 U4.23
  Bottom Layer w0.254: v1(160.675,55.6) 160.675,61.475 161.275,62.075 v1(161.275,68.575)
LEM_BUF: C1.2 R1.2 U1.5 | length 18.7
  Top Layer w0.254: R1.2 31.411,73.775 35.511,77.875 41.15,77.875 41.705,78.43 U1.5
LEM_OUT: J3.2 R65.2 SW1.4 U4.27 | length 220.6
  Top Layer w0.254: J3.2 61.75,91.4 62.35,92 R65.2 74.35,92 75.175,91.175 146.225,91.175 150.6,95.55 150.6,97 151.675,98.075 164.95,98.075 168.05,94.975 168.05,93.025 170,91.075 v1(170,89.425) ; U4.27 162.125,67.775 162.778,68.428 v1(165.983,68.428)
  Bottom Layer w0.254: v1(165.983,68.428) 165.983,71.892 165.975,71.9 165.975,72.5 170.675,77.2 170,77.875 v1(170,89.425)
  Bottom Layer w0.4: SW1.4 15.275,74.55 14.775,75.05 14.775,84.475 23.375,93.075 23.375,94.95 25.85,97.425 59.875,97.425 61.75,95.55 J3.2
LEM_TEST: R67.1 R68.2 SW1.6 | length 9.4
  Top Layer w0.254: SW1.6 16.675,82.95 15.425,84.2 15.425,85.7 15.675,85.95 R68.2
MISO: J11.1 U4.1 | length 31.6
  Top Layer w0.254: U4.1 161.175,63.5 164.9,67.225 v1(165.925,67.225) ; v1(171.4,76.625) 176.5,76.625 177.15,77.275 J11.1@177.15,82.95
  Bottom Layer w0.254: v1(165.925,67.225) 166.65,67.225 166.9,67.475 166.9,72.775 170.75,76.625 v1(171.4,76.625)
MOSI: J11.4 U4.2 | length 30.9
  Top Layer w0.254: U4.2 161.975,63.575 164.5,66.1 v1(165.925,66.1) ; J11.4@172.725,85.725 v1(172.725,86.6)
  Bottom Layer w0.254: v1(165.925,66.1) 166.875,66.1 167.45,66.675 167.45,71.65 172.725,76.925 v1(172.725,86.6)
NetC3_2: C3.2 R4.2 U1.9 | length 11.8
  Top Layer w0.254: R4.2@33,70.55 35.35,70.55 35.35,73.2 35.55,73.4 39.825,73.4 40.435,74.01 U1.9
NetLED1_2: LED1.2 R103.1 | length 5.5
  Top Layer w0.254: LED1.2@16.375,63 R103.1@21.875,63
NetQ1_1: Q1.1 R5.2 R6.1 | length 9.1
  Top Layer w0.254: R5.2 46.7,36.625 ; Q1.1 46.7,36.625 ; R6.1 47.475,35.85 46.7,36.625
NetQ1_3: Q1.3 R14.1 | length 2.8
  Top Layer w0.4: Q1.3 R14.1@50.5,40.925
NetQ2_1: Q2.1 R7.1 R14.2 | length 8.2
  Top Layer w0.4: R14.2@50.975,39.425 52.7,39.425 53.275,38.85 53.275,35.925 54.45,34.75 R7.1@55.55,34.75
NetQ3_1: Q3.1 R9.1 R10.1 | length 9.2
  Top Layer w0.254: R10.1 46.675,50.075 47.325,49.425 49.225,49.425 49.625,49.825 R9.1@50.95,49.825 ; 46.7,50.1 Q3.1
NetQ3_3: Q3.3 R12.2 | length 2.9
  Top Layer w0.4: Q3.3 R12.2@50.55,54.275
NetQ4_1: Q4.1 R11.2 R12.1 | length 8
  Top Layer w0.4: R12.1 52.75,52.35 53.225,51.875 53.225,49.175 54.275,48.125 R11.2@55.4,48.125
NetQ5_1: Q5.1 R15.1 R16.1 | length 9
  Top Layer w0.254: R15.1@44.075,64.9 46.7,64.9 ; Q5.1 46.7,64.9 ; R16.1@50.8,64 47.6,64 46.7,64.9
NetQ5_3: Q5.3 R17.2 | length 3
  Top Layer w0.4: Q5.3@47.7,69.125 R17.2
NetQ6_1: Q6.1 R17.1 R18.2 | length 8.6
  Top Layer w0.4: R17.1@50.9,67.525 52.55,67.525 53.175,66.9 53.175,63.8 54.175,62.8 R18.2@55.75,62.8
NetQ20_1: Q20.1 R75.2 | length 5.5
  Top Layer w0.254: Q20.1 142.925,66.425 143.15,66.2 R75.2@147.575,66.2
NetQ20_2: Q20.2 R71.2 R76.1 | length 18.8
  Top Layer w0.2: 136.75,72.9 138.45,72.9
  Top Layer w0.254: R76.1 135,70.1 135.725,69.375 R71.2 ; R76.1@135.15,72.325 135.925,72.325 136.5,72.9 136.75,72.9 ; 138.45,72.9 142.775,72.9 143.875,71.8 Q20.2
NetQ20_4: Q20.4 R74.2 | length 2.6
  Top Layer w0.254: R74.2@144.825,62.475 Q20.4
NetQ20_5: Q20.5 R72.2 R73.1 | length 16.8
  Top Layer w0.254: R72.2 139.6,71.95 140.225,71.325 R73.1 141.425,69.375 141.7,69.1 141.7,63.1 141.95,62.85 143.65,62.85 143.875,63.075 Q20.5
NetQ21_1: Q21.1 R82.2 | length 1.6
  Top Layer w0.254: R82.2@135.875,61.7 Q21.1
NetQ21_2: Q21.2 R77.1 R78.2 | length 12
  Top Layer w0.2: 130.65,61.675 132.325,61.675
  Top Layer w0.254: R78.2 R77.1 ; R78.2@128.4,62.3 129.5,62.3 130.125,61.675 130.65,61.675 ; 132.325,61.675 134.675,61.675 134.925,61.925 Q21.2
NetQ21_4: Q21.4 R79.2 | length 5.4
  Top Layer w0.254: Q21.4 133.975,64.675 134.225,64.425 R79.2@138.5,64.425
NetQ21_5: Q21.5 R80.2 R81.1 | length 8.7
  Top Layer w0.254: R81.1 R80.2 ; R80.2@131.575,66.675 133.075,66.675 133.575,67.175 134.5,67.175 134.925,66.75 Q21.5
NetQ22_1: Q22.1 R88.2 | length 1.9
  Top Layer w0.254: Q22.1 R88.2@124.15,61.35
NetQ22_2: Q22.2 R83.1 R84.2 | length 8.3
  Top Layer w0.254: R83.1 R84.2 120.925,59.875 121.25,60.2 Q22.2
NetQ22_4: Q22.4 R85.2 | length 6.7
  Top Layer w0.254: Q22.4 120.3,62.65 120.55,62.4 R85.2@126.125,62.4
NetQ22_5: Q22.5 R86.2 R87.1 | length 11.1
  Top Layer w0.2: 116.75,64.525 118.825,64.525
  Top Layer w0.254: R87.1 R86.2 ; R86.2@115.275,64.05 116.275,64.05 116.75,64.525 ; 118.825,64.525 119.475,64.525 119.675,64.725 121.075,64.725 121.25,64.55 Q22.5
NetQ23_1: Q23.1 R94.2 | length 6.4
  Top Layer w0.254: Q23.1 102.9,58.425 103.15,58.175 106.475,58.175 106.95,58.65 R94.2
NetQ23_2: Q23.2 R89.1 R90.2 | length 12.8
  Top Layer w0.2: 98.225,60.2 99.9,60.2
  Top Layer w0.254: R90.2 R89.1@96.05,59.225 ; R89.1@96.5,59.6 97.575,59.6 98.15,60.175 ; 99.9,60.2 100.975,60.2 101.5,60.725 103.45,60.725 103.85,60.325 Q23.2
NetQ23_4: Q23.4 R91.2 | length 2.6
  Top Layer w0.254: Q23.4 105.95,57.125 R91.2
NetQ23_5: Q23.5 R92.2 R93.1 | length 10.1
  Top Layer w0.254: R93.1 103.5,55.425 103.85,55.775 Q23.5 ; R93.1@99.075,55.45 R92.2
NetQ24_1: Q24.1 R100.2 | length 7.2
  Top Layer w0.254: Q24.1 101.575,45.85 101.925,45.5 104.925,45.5 105.875,46.45 R100.2
NetQ24_2: Q24.2 R95.1 R96.2 | length 10.2
  Top Layer w0.254: R96.2 98.025,47.95 102.175,47.95 102.525,47.6 Q24.2
NetQ24_4: Q24.4 R97.2 | length 4.1
  Top Layer w0.254: Q24.4@103.475,44.15 R97.2@107.525,44.15
NetQ24_5: Q24.5 R98.2 R99.1 | length 14.1
  Top Layer w0.2: 97.025,42.5 99.025,42.5
  Top Layer w0.254: R99.1 R98.2 ; R99.1@94.525,41.7 96.225,41.7 97.025,42.5 ; 99.025,42.5 102.125,42.5 102.525,42.9 Q24.5
NetR1_1: R1.1 SW1.5 | length 17.8
  Top Layer w0.254: SW1.5 18.275,78.65 18.275,80.1 19.525,81.35 21.975,81.35 22.675,80.65 22.675,78.925 23.325,78.275 26.075,78.275 26.725,77.625 26.725,76 27.1,75.625 R1.1@26.7,75.625
NetR2_1: R2.1 U1.1 | length 17.2
  Top Layer w0.254: R2.1 40.45,71.975 40.875,72.4 47,72.4 48.45,73.85 48.45,77.275 46.95,78.775 U1.1@46.95,80.425
NetR2_2: R2.2 U3.1 | length 4.2
  Top Layer w0.254: U3.1 39.65,66.45 40.45,67.25 R2.2
NetR3_1: R3.1 U3.2 | length 4.2
  Top Layer w0.254: R3.1 37.85,67.475 38.7,66.625 U3.2
NetR3_2: R3.2 U1.2 | length 19.7
  Top Layer w0.254: R3.2 37.85,72.35 38.466,72.966 46.591,72.966 47.825,74.2 47.825,76.975 46.65,78.15 45.975,78.15 45.515,78.61 U1.2
NetR4_1: R4.1 U3.4 | length 11.4
  Top Layer w0.254: R4.1@32.65,68.85 32.65,62.65 33.225,62.075 U3.4@37.625,62.075
NetR5_1: R5.1 U1.14 | length 61.9
  Top Layer w0.254: R5.1 44.075,47.95 40.725,51.3 37.125,51.3 36.65,51.775 36.65,55.775 30.175,62.25 30.175,66.2 31.575,67.6 31.575,73.325 35.625,77.375 46.35,77.375 46.785,76.94 U1.14
NetR40_1: R40.1 R41.2 TR2.2 U1.4 | length 24.3
  Top Layer w0.254: v1(37.719,93.726) TR2.2@37.719,94.631 ; TR2.2 42.317,95.408 42.975,94.75 U1.4
  Bottom Layer w0.254: R40.1@36.322,93.726 R41.2@39.624,93.726
NetR42_1: R42.1 R43.1 TR1.2 U1.6 | length 30.1
  Top Layer w0.254: v1(27.051,93.599) TR1.2@27.051,95.026 ; TR1.2 31.142,95.408 32.1,94.45 32.1,90 35.375,86.725 39.225,86.725 40.435,85.515 U1.6
  Bottom Layer w0.254: R42.1@25.654,93.599 R43.1@28.956,93.599
NetR44_1: R44.1 R45.1 TR3.2 U1.8 | length 28.2
  Top Layer w0.254: v1(37.85,75.4) U1.8 ; v1(48.387,93.726) TR3.2@48.387,94.637
  Bottom Layer w0.254: v1(37.85,75.4) 37.85,77.85 44.8,84.8 44.8,92.825 45.4,93.425 R44.1@46.9,93.425 ; R44.1@46.99,93.726 R45.1@50.292,93.726
RESET: C32.2 J11.5 R66.1 U4.31 | length 75.8
  Top Layer w0.254: v1(147.675,93.75) 150,96.075 150,97.35 151.425,98.775 165.225,98.775 168.6,95.4 168.6,93.175 171.725,90.05 172.65,90.05 J11.5@174.575,88.125 ; R66.1@153.7,79.175 C32.2@153.7,81.725 ; U4.31 161.525,64.575 162.925,65.975 v1(162.925,67.075)
  Bottom Layer w0.254: v1(147.675,93.75) 147.675,86.525 v1(153.7,80.5) 162.925,71.275 v1(162.925,67.075)
RST_BTN: J1.19 K6.12 | length 47.4
  Top Layer w0.8: v3@130.025,75.625 J1.19
  Bottom Layer w0.8: K6.12 91.01,72.51 96.375,77.875 129.55,77.875 130.1,77.325 v3(130.1,75.625)
SCK: J11.3 U4.12 | length 30.2
  Top Layer w0.254: U4.12 170.05,66.175 170.357,66.482 170.357,69.357 171.225,70.225 171.225,74.725 172.1,75.6 177.225,75.6 178.25,76.625 178.25,84.525 177.5,85.275 J11.3@175.025,85.275
SHDN_IN: J1.2 K5.5 | length 45.1
  Top Layer w0.8: v3(111.875,80) J1.2@111.875,81.5 ; J1.2@112,80.875 J1.2@112,82.75
  Bottom Layer w0.8: K5.5 78.359,81.541 85.85,74.05 90.65,74.05 95.6,79 110.875,79 v3(111.875,80)
SHDN_LINK0: K4.5 K5.6 | length 16.9
  Bottom Layer w0.8: K5.6 73.787,84.201 76.2,81.788 76.2,73.914 77.216,72.898 K4.5
SHDN_LINK1: K3.5 K4.6 | length 14.5
  Bottom Layer w0.8: K4.6 70.739,69.215 K3.5
SHDN_LINK2: K2.5 K3.6 | length 14.6
  Bottom Layer w0.8: K3.6 76.454,55.88 76.454,52.07 K2.5
SHDN_LINK3: K1.5 K2.6 | length 14.5
  Bottom Layer w0.8: K2.6 76.835,44.069 76.835,40.386 K1.5
SHDN_OUT: J1.16 K1.6 | length 93.2
  Top Layer w0.8: v3(121.025,71.025) J1.16
  Bottom Layer w0.8: K1.6 70.739,35.179 68.58,33.02 68.58,31.345 71.275,28.65 79.425,28.65 81.153,30.378 81.153,33.428 88.873,41.148 97.448,41.148 99.445,43.145 99.445,43.806 100.019,44.38 100.68,44.38 121,64.7 v3@121,72.5
  other v3: 121.025,72.5
SHDN_SEG1: J1.6 R83.2 | length 21.7
  Top Layer w0.254: R83.2@118,65.85 121.225,65.85 125.5,70.125 125.5,80 124.025,81.475 J1.6
SHDN_SEG2: J1.7 R77.2 | length 14.3
  Top Layer w0.254: J1.7 127.025,81.475 128.5,80 R77.2@128.5,68.25
SHDN_SEG3: J1.8 R80.1 | length 14.4
  Top Layer w0.254: J1.8@130,81.95 130,81.5 131.5,80 R80.1
SHDN_SEG10: J1.9 R76.2 | length 8.7
  Top Layer w0.254: J1.9 133.025,81.475 134.5,80 R76.2@134.5,73.875
SHDN_SEG11: J1.10 R72.1 | length 8.7
  Top Layer w0.254: J1.10 136.025,80.975 137.5,79.5 R72.1@137.5,73.85
SHDN_TEMP: R101.2 R102.1 U4.18 | length 14.8
  Top Layer w0.254: U4.18 165.975,71.75 166.2,71.975 169.35,71.975 170.675,73.3 170.675,77.225 171.375,77.925 R102.1
SHDN_WARN1: R85.1 U4.26 | length 45.6
  Top Layer w0.254: R85.1 126.175,58.6 126.566,58.209 155.384,58.209 v1(156.7,59.525) ; v1(156.7,68.575) U4.26
  Bottom Layer w0.254: v1(156.7,59.525) v1(156.7,68.575)
SHDN_WARN2: R79.1 U4.25 | length 32.5
  Top Layer w0.254: R79.1 138.175,59.35 138.448,59.077 152.327,59.077 153.025,59.775 153.025,65.95 156.45,69.375 U4.25
SHDN_WARN3: R82.1 U4.32 | length 28.1
  Top Layer w0.254: R82.1 136.4,59.625 137.382,58.643 154.993,58.643 155.6,59.25 155.6,62.65 156.725,63.775 U4.32
SHDN_WARN10: R74.1 U4.29 | length 19.4
  Top Layer w0.254: R74.1 v1(151.95,60.875) ; v1(153.975,60.875) 153.975,65.5 154.65,66.175 U4.29
  Bottom Layer w0.254: v1(151.95,60.875) v1(153.975,60.875)
SHDN_WARN11: R75.1 U4.30 | length 13.3
  Top Layer w0.254: R75.1 v1(151.95,64.3) ; v1(155.025,64.3) 155.025,64.975 155.425,65.375 U4.30
  Bottom Layer w0.254: v1(151.95,64.3) v1(155.025,64.3)
SW_MON: R69.2 SW1.2 U4.16 | length 249.3
  Top Layer w0.254: SW1.2 23.45,77.05 23.95,76.55 23.95,69.95 ; R69.2 23.95,69.95 ; U4.16@168.4,69.375 v1(168.4,70.325) ; v1(171.95,73.725) 172.675,74.45 177.2,74.45 178.325,73.325 178.325,56.375 176,54.05 116.1,54.05 112.875,50.825 112.875,40.25 110.425,37.8 82.925,37.8 74.225,29.1 45.3,29.1 37.05,37.35 27.5,37.35 26.55,38.3 26.55,64.125 23.95,66.725 23.95,69.95
  Bottom Layer w0.254: v1(168.4,70.325) 168.4,71.3 170.825,73.725 v1(171.95,73.725)
TSAL_NEG: C11.1 DC1.16 J1.18 | length 62.2
  Top Layer w0.254: C11.1@108.4,30.3 108.55,30.15 116.575,30.15 118.048,31.623 DC1.16
  Top Layer w0.8: v3@127.025,71.025 J1.18
  Bottom Layer w0.8: DC1.16 127,38.862 v3(127,72.5)
  other v3: 127,71
TSAL_POS: C11.2 DC1.14 J1.17 | length 57.4
  Top Layer w0.254: C11.2 111.275,32.225 111.877,31.623 DC1.14
  Top Layer w0.8: v3@124.025,71.025 J1.17
  Bottom Layer w0.8: DC1.14 124,40.942 v3(124,72.5)
  other v3: 124,71
XTAL1: C50.2 U4.10 Y1.1 | length 8.4
  Top Layer w0.254: U4.10 170.475,64.575 170.8,64.25 170.8,63.575 170.975,63.4 Y1.1@175.7,63.4
XTAL2: C51.2 U4.11 Y1.2 | length 10.3
  Top Layer w0.254: U4.11 170.475,65.375 170.775,65.675 170.775,66.286 170.984,66.495 170.984,68.534 171.15,68.7 Y1.2@175.575,68.7
pads on no net: DC1.1 DC1.9 DC1.11 J1. J1.21 J2. J2.6 J2.7 J3.1 J5. J6. K6.6 K6.7 SW1.1 U1.13 U4.13 U4.24
copper on no net:
  other v2: 87.757,28.067 31.75,28.194 161.798,28.194 173.863,28.194 16.809,28.295 89.789,29.083 33.782,29.21 85.725,29.21 163.83,29.21 175.895,29.21 18.841,29.311 29.718,29.337 159.766,29.337 171.831,29.337 14.777,29.438 84.836,31.242 90.805,31.242 28.829,31.369 34.798,31.369 158.877,31.369 164.846,31.369 170.942,31.369 176.911,31.369 13.888,31.47 19.857,31.47 85.725,33.274 89.916,33.274 29.718,33.401 33.909,33.401 159.766,33.401 163.957,33.401 171.831,33.401 176.022,33.401 14.777,33.502 18.968,33.502 87.757,34.163 31.75,34.29 161.798,34.29 173.863,34.29 16.809,34.391 31.75,78.105 88.265,78.232 161.798,78.359 33.782,79.121 29.718,79.248 90.297,79.248 86.233,79.375 163.83,79.375 159.766,79.502 28.829,81.28 34.798,81.28 85.344,81.407 91.313,81.407 158.877,81.534 164.846,81.534 29.718,83.312 33.909,83.312 86.233,83.439 90.424,83.439 159.766,83.566 163.957,83.566 31.75,84.201 88.265,84.328 161.798,84.455 16.764,92.075 173.99,92.075 18.796,93.091 176.022,93.091 14.732,93.218 171.958,93.218 13.843,95.25 19.812,95.25 171.069,95.25 177.038,95.25 14.732,97.282 18.923,97.282 171.958,97.282 176.149,97.282 16.764,98.171 173.99,98.171

## Polygon pours and split planes (outlines as drawn)
GND on Bottom Layer "GLV_GND_PLANE1" (solid, remove dead copper, pour order 4): 26.575,45.375 26.575,27.15 129.85,27.15 129.85,27.8 129.85,54.525 178.425,54.525 178.425,89.625 171.975,89.625 168,93.6 168,96.675 168,98.825 145.75,98.825 145.75,93.25 142.95,90.45 104.486,90.45 100.8,94.173 100.8,98.425 26.8,98.425 13.375,85.225 13.375,59.525 14.625,58.275 26.375,58.275 26.575,58.075 26.575,45.45

## Silkscreen, mask and mechanical layers (free items; w line width, h text height)
Top Overlay:
  drawing of 1488 lines, arcs and shapes, not listed
  text "Current Sense" at 65.6,98.225 h1.2
  text "Brake" at 25.1,97.65 h1.2
  text "Current" at 35.1,97.65 h1.2
  text "Time" at 46.6,97.65 h1.2
  text "+" at 30.861,96.139 h1.52 r180
  text "+" at 41.529,96.139 h1.52 r180
  text "+" at 52.197,96.139 h1.52 r180
  text "-" at 23.241,94.742 h1.52
  text "-" at 33.782,94.615 h1.52
  text "-" at 44.45,94.615 h1.52
  text "GLV Harness" at 143.35,88.4 h1.2
  text "Brake Plausibility" at 40.45,83.725 h1.2
  text "NORMAL" at 14.725,82.3 h1.5
  text "BSPD TEST" at 13.3,70.05 h1.5
  text "PWR" at 14.775,64.4 h1.2
  text "Bender LV" at 31.75,58.928 h1.2
  text "GLV Separation" at 165.75,54.475 h1.2
  text "TSAL ISO Power" at 110.275,27.25 h1.2
  text "Shutdown Control v1" at 50.775,27.2 h1.2
Bottom Overlay:
  lines w0.254: 22.352,87.8 22.352,96.901 52.578,96.901 52.578,87.8 22.352,87.8
  lines w2: 131.675,27.45 131.675,52.705 177.927,52.705
  text "Fixed BSPD settings" at 52.324,97.79 h1.2
  text "Brake" at 29.125,88.6 h1.2
  text "Current" at 40.65,88.6 h1.2
  text "Time" at 50.325,88.6 h1.2
  text "GLV Separation" at 177.975,54.475 h1.2
Mechanical 1:
  lines w0.254: 178.943,36.957 ccw(c176.943,36.957) 176.943,38.957 174.371,38.957 cw(c174.371,40.957) 172.371,40.957 172.371,47.742 cw(c174.371,47.742) 174.371,49.742 176.943,49.742 ccw(c176.943,51.742) 178.943,51.742 ; 178.955,36.957 178.955,31.289 cw(c173.955,31.289) 173.955,26.289 157.125,26.289 cw(c157.125,28.289) 155.125,28.289 155.125,30.4 ccw(c153.125,30.4) 153.125,32.4 146.325,32.4 ccw(c146.325,30.4) 144.325,30.4 144.325,28.289 cw(c142.325,28.289) 142.325,26.289 16.856,26.289 cw(c16.856,31.289) 11.856,31.289 11.856,37.85 cw(c13.856,37.85) 13.856,39.85 22.25,39.85 ccw(c22.25,41.85) 24.25,41.85 24.25,54.65 ccw(c22.25,54.65) 22.25,56.65 13.856,56.65 cw(c13.856,58.65) 11.856,58.65 11.856,95.144 cw(c16.856,95.144) 16.856,100.144 101.425,100.144 cw(c101.425,98.144) 103.425,98.144 103.425,94 ccw(c105.425,94) 105.425,92 142.575,92 ccw(c142.575,94) 144.575,94 144.575,98.144 cw(c146.575,98.144) 146.575,100.144 173.955,100.144 cw(c173.955,95.144) 178.955,95.144 178.955,51.742